# Altium PCB BMS_PCB.PcbDoc
Units mm, origin at the board's own origin, x right, y up, seen from the top; angles counter-clockwise.
Board outline 46.36 x 48.89 mm, 2 copper layers (Top Layer, Bottom Layer); 61 components, 46 nets, 183 pads, 107 vias.
Unrouted connection lines stored in the file: 2.
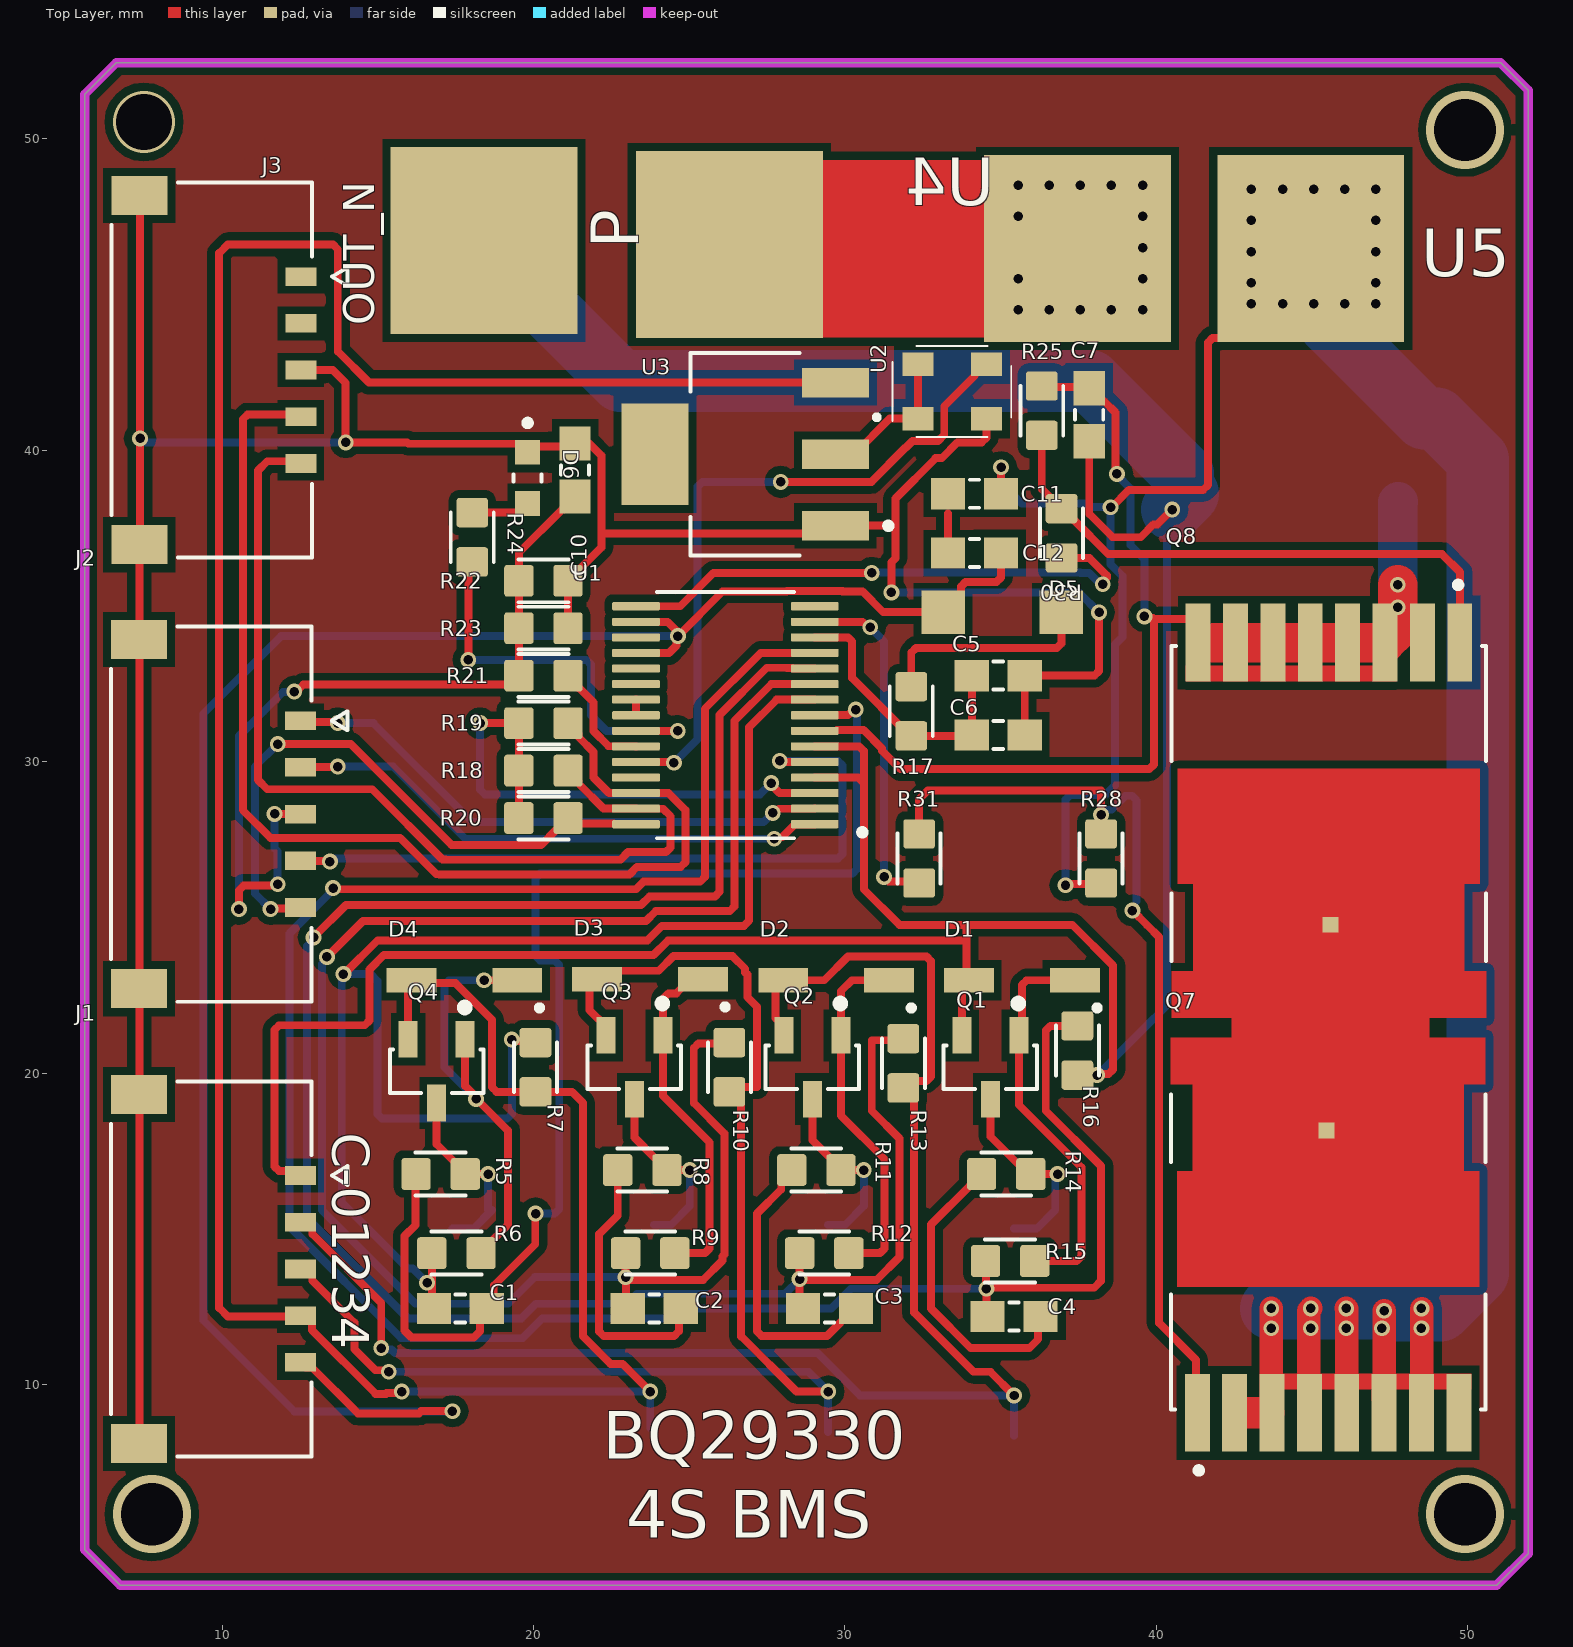
[diagram p0: Top Layer view]
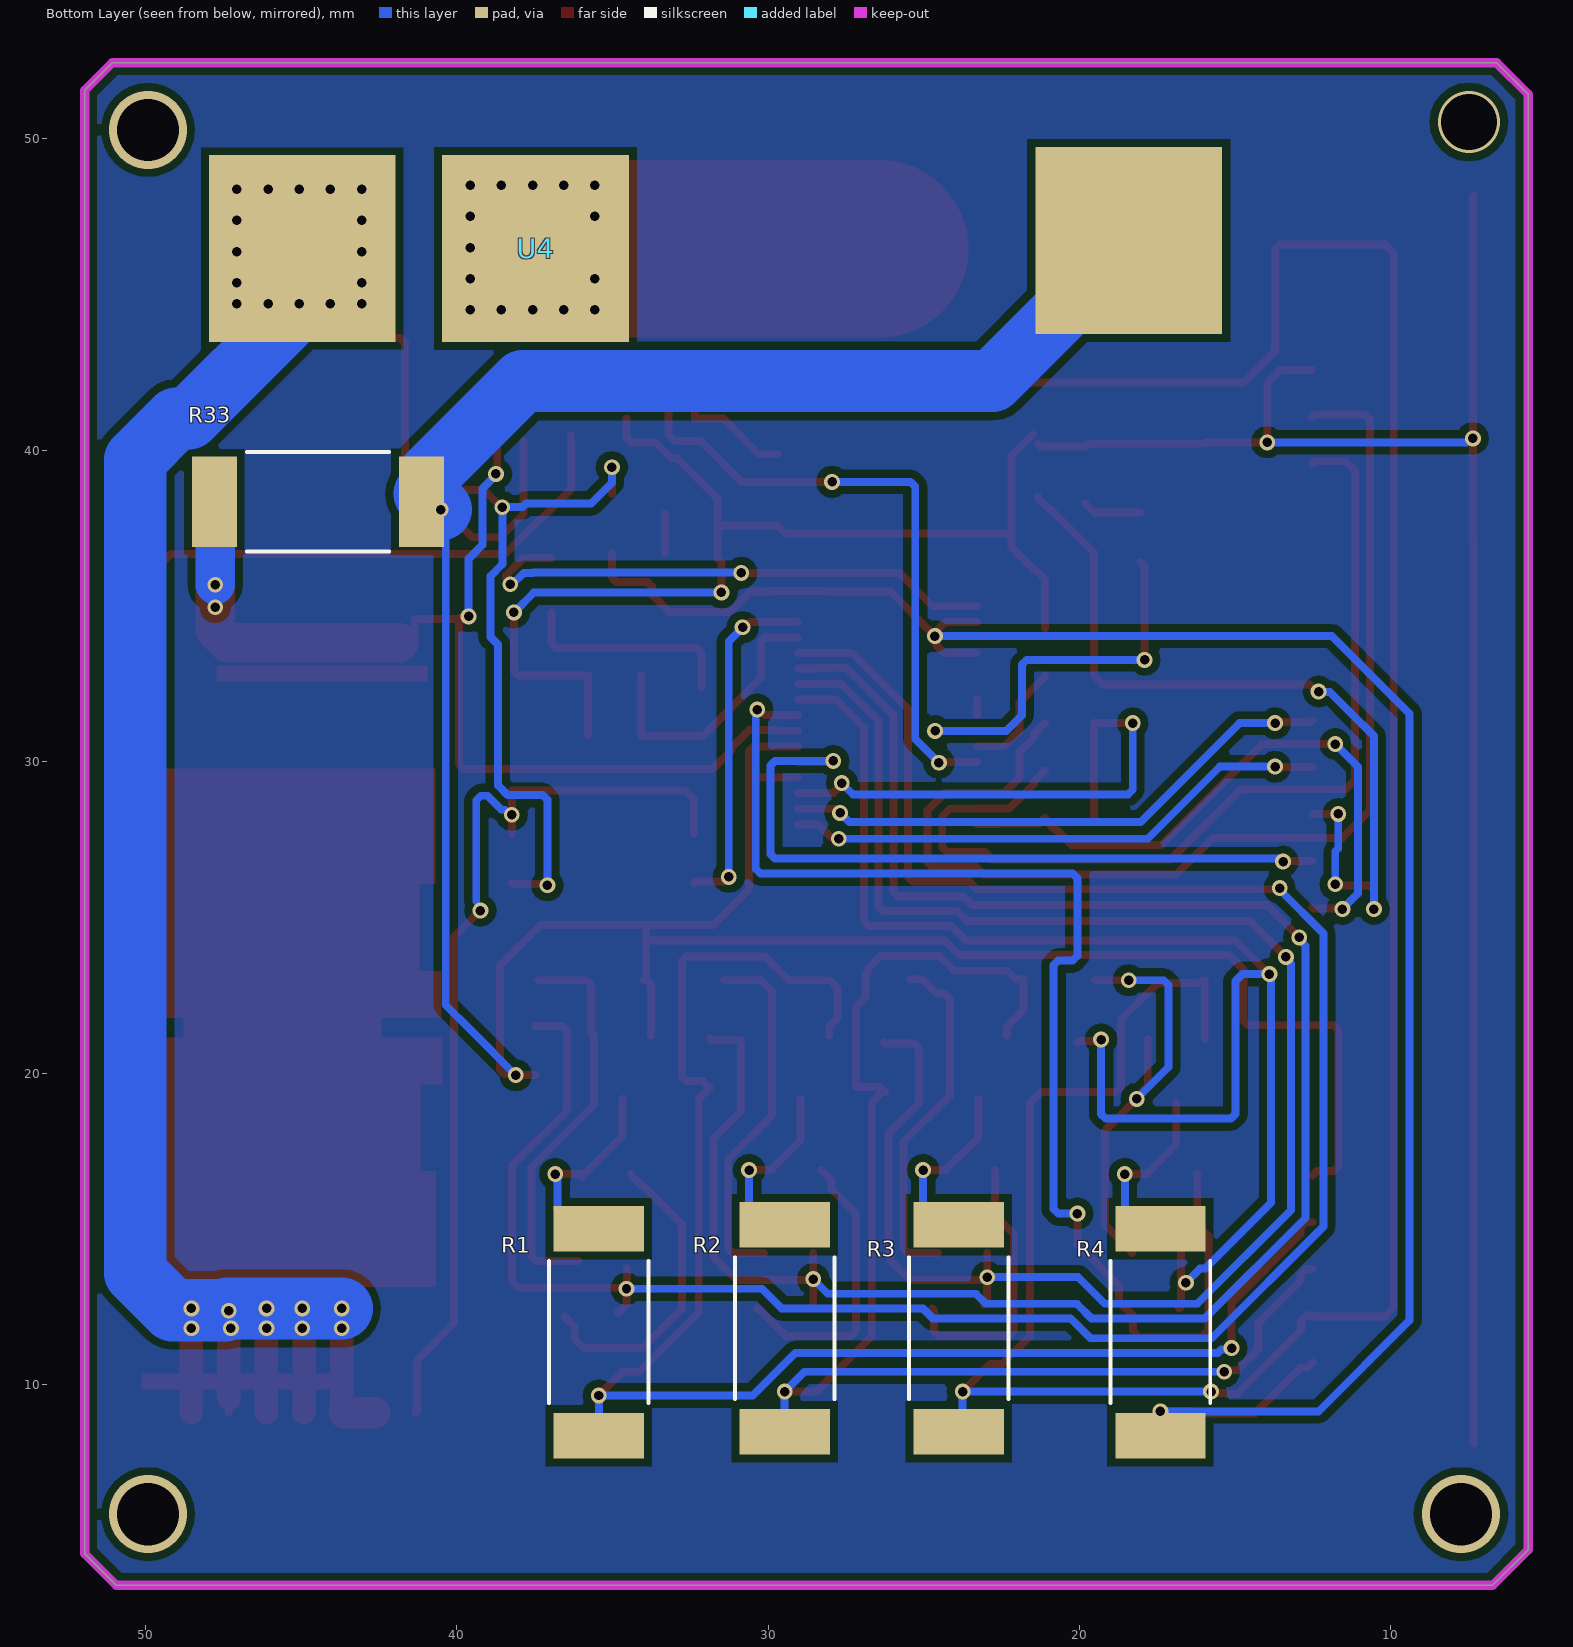
[diagram p1: Bottom Layer view, seen from below]
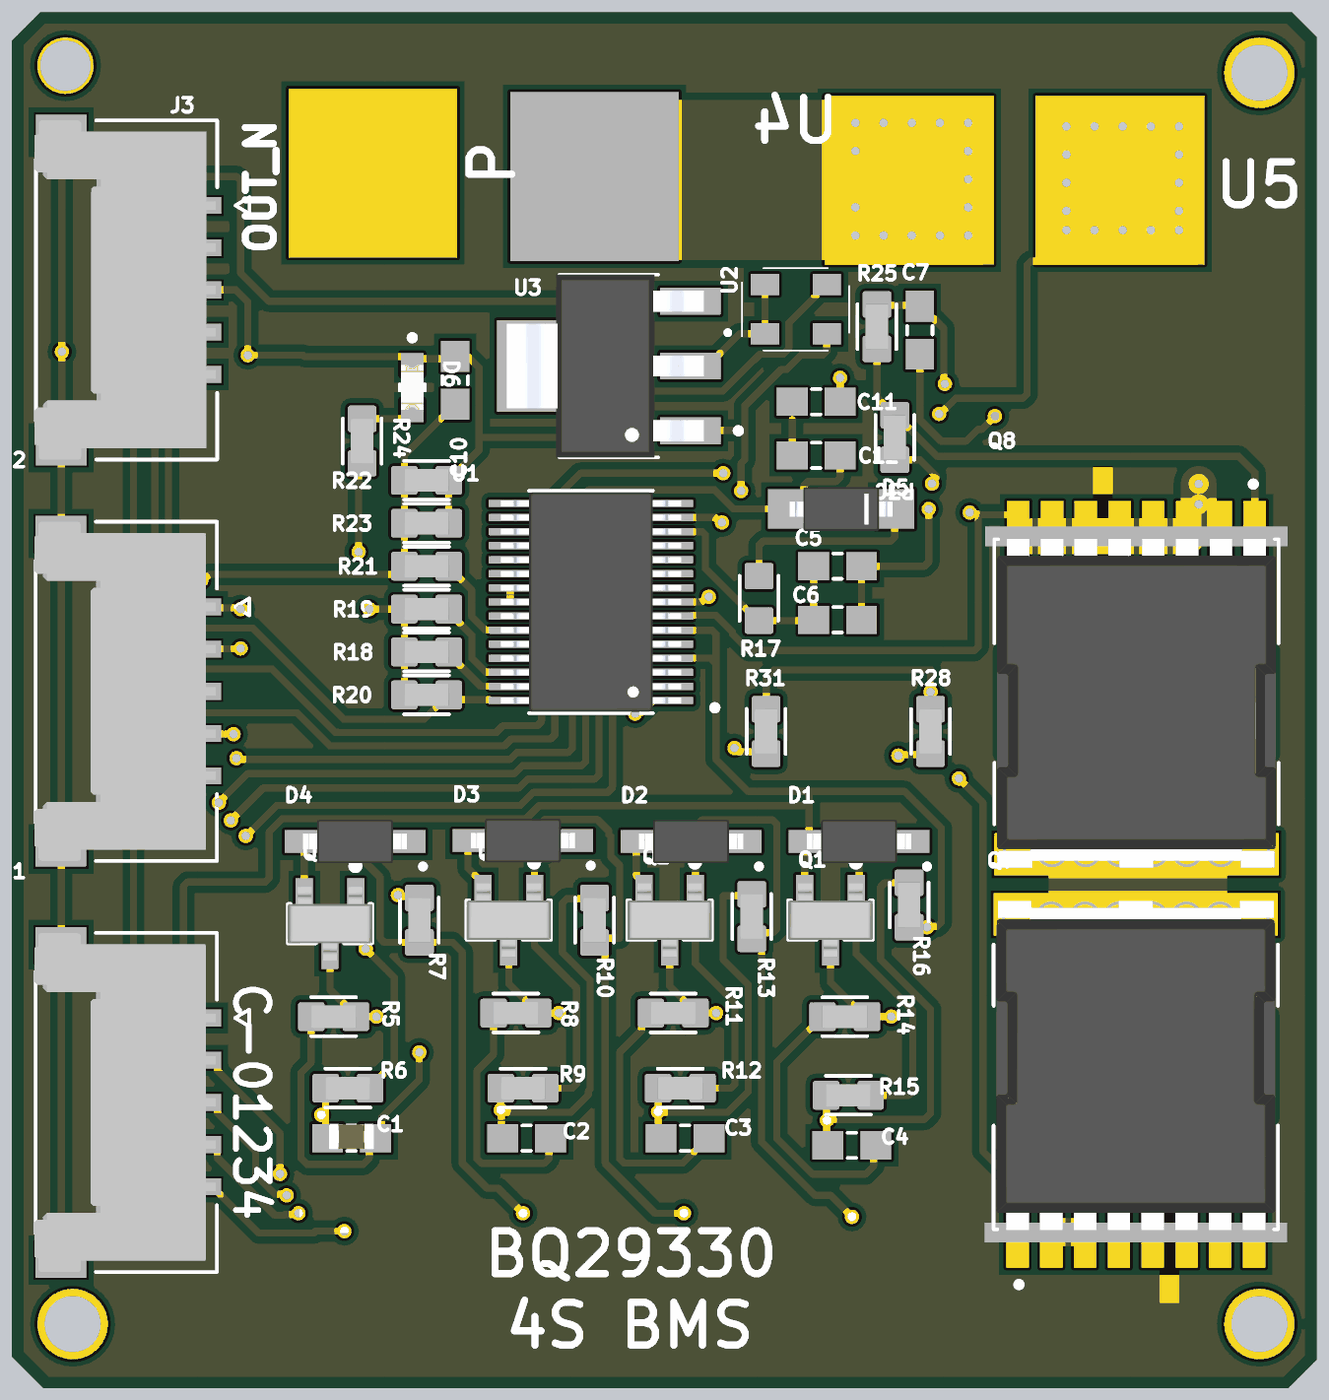
[diagram p2: 3D render of the assembled board from above, using the file's embedded part models]
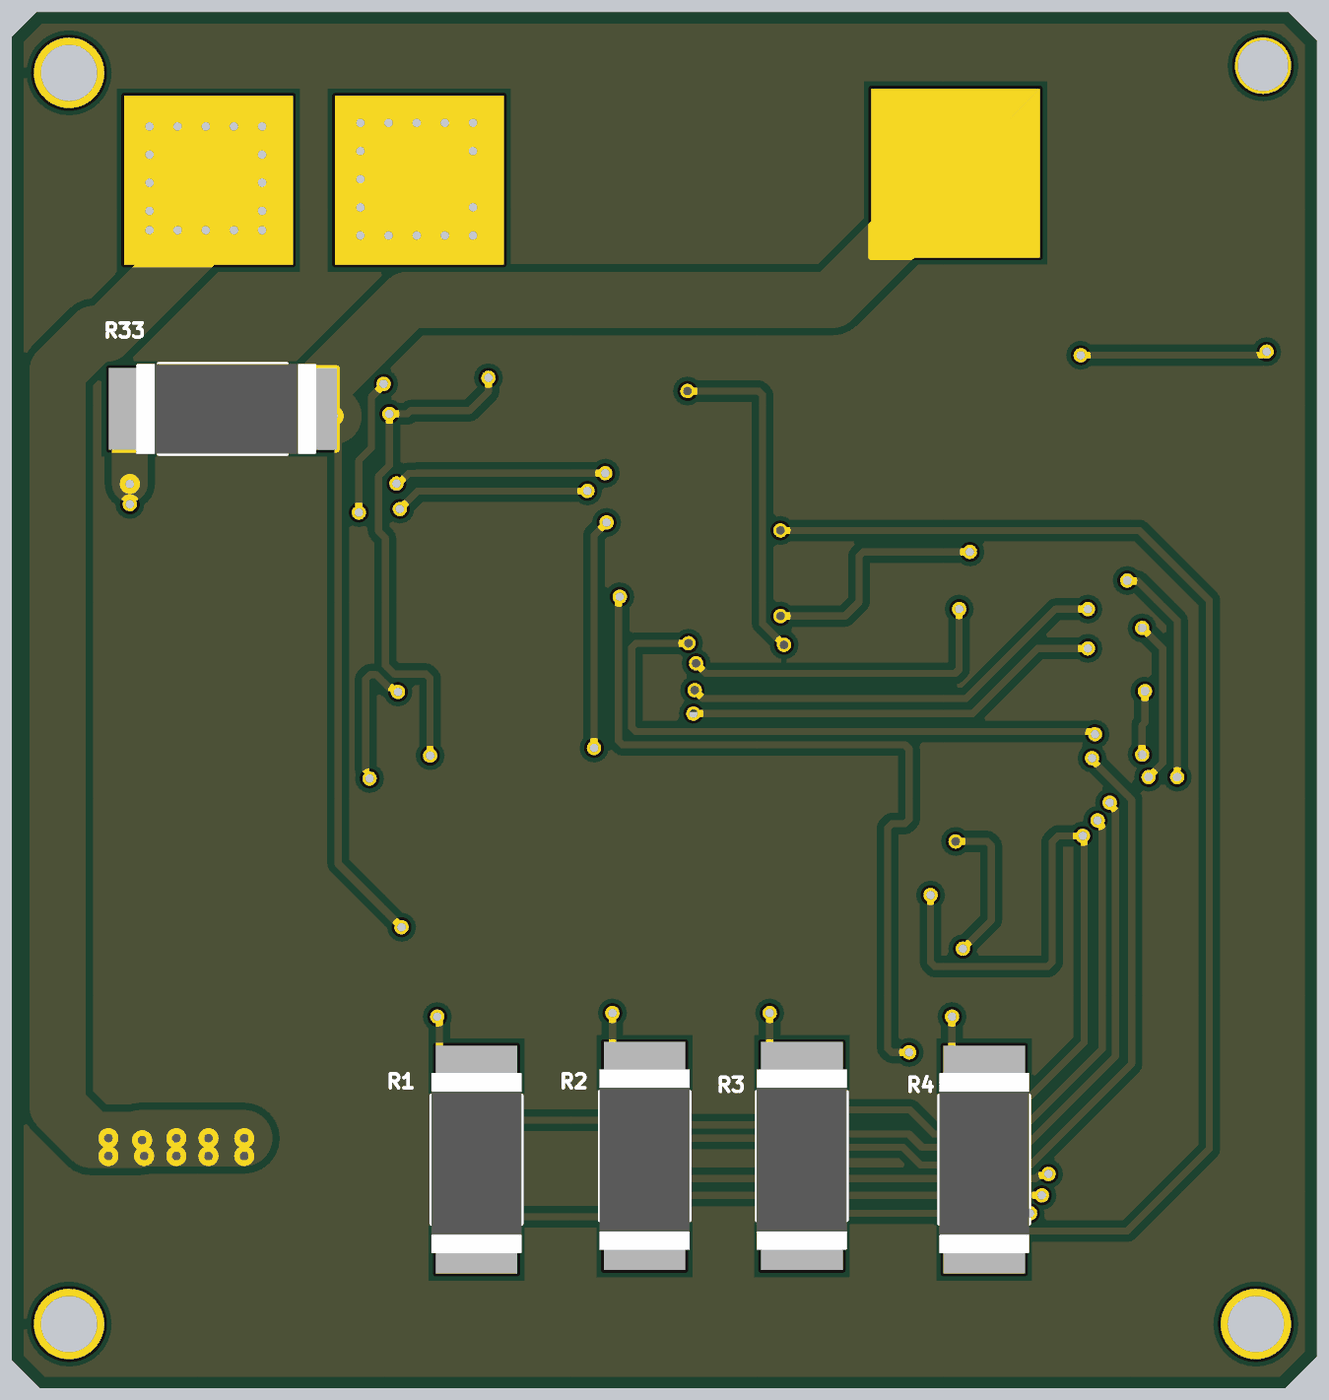
[diagram p3: 3D render of the assembled board from below, using the file's embedded part models]

## Layer stack, top to bottom
Top Solder: solder mask 0.0102, Solder Resist, Dk 3.5
Top Layer: signal copper 0.0356
Dielectric 1: dielectric 0.32, FR-4, Dk 4.8
Bottom Layer: signal copper 0.0356
Bottom Solder: solder mask 0.0102, Solder Resist, Dk 3.5

## Board outline
5.588,4.699 5.588,51.435 6.604,52.451 51.054,52.451 51.943,51.562 51.943,4.572 50.927,3.556 6.731,3.556

## Design rules (kind name [scope] priority, off if disabled: settings)
Clearance [All] p1: gap=0.254 ignorepadtopadclearanceinfootprint=FALSE except(0: Arc-Hole Track-Hole SMDPad-Hole THPad-Hole Via-Hole Fill-Hole Poly-Hole Region-Hole Text-Hole; 0.22: Arc-Arc Arc-Track Arc-SMDPad Track-Track Track-SMDPad SMDPad-SMDPad)
DiffPairsRouting [All] p1: maxlimit=0.254 minlimit=0.24 mostfreqgap=0.24 toplayer_minwidth=0.381 toplayer_maxwidth=0.381 toplayer_prefwidth=0.381 bottomlayer_minwidth=0.381 bottomlayer_maxwidth=0.381 bottomlayer_prefwidth=0.381 maxuncoupledlength=12.7
PolygonConnect [All] p1: connectstyle=Relief reliefconductorwidth=0.254 reliefentries=4 polygonreliefangle="90 Angle" airgapwidth=0.254
RoutingVias [All] p1: holewidth=0.711 width=1.27 viastyle="Through Hole" minholewidth=0.711 minwidth=1.27 maxholewidth=0.711 maxwidth=1.27
SolderMaskExpansion [All] p1: expansion=0.102 istentingtop=FALSE
Width [All] p1: maxlimit=10 minlimit=0.254 preferedwidth=0.254 minimp=50.000000 maximp=50.000000 favimp=50.000000
29 further rules are at their usual default settings.

## Components (designator, comment, footprint, x,y, rotation, side; value= is the part's Value field where it differs from the comment)
C1 "0.1uF" CAPC1608X90 17.653,12.446 r180 top
C2 "0.1uF" CAPC1608X90 23.876,12.446 r180 top
C3 "0.1uF" CAPC1608X90 29.503,12.446 r180 top
C4 "0.1uF" CAPC1608X90 35.433,12.192 r180 top
C5 "2.2uF" CAPC1608X90 34.925,32.766 r0 top
C6 "2.2uF" CAPC1608X90 34.925,30.861 r0 top
C7 "0.1uF" CAPC1608X90 37.846,41.148 r90 top
C10 "0.1uF" CAPC1608X90 21.336,39.37 r90 top
C11 "50V 0.1uF" CAPC1608X90 34.163,38.608 r180 top
C12 "50V 0.1uF" CAPC1608X90 34.163,36.703 r0 top
D1 "MMSZ5232B+" SOD123#1 35.687,22.987 r180 top
D2 "MMSZ5232B+" SOD123#1 29.718,22.987 r180 top
D3 "MMSZ5232B+" SOD123#1 23.741,23.019 r180 top
D4 "MMSZ5232B+" SOD123#1 17.78,22.987 r180 top
D5 "MMSD4148T1G" SOD123#2 35.052,34.798 r180 top
D6 "SML-D12U1WT86" LED_SML-D12Y1WT86 19.812,39.116 r270 top
J1 "5040500591" MOLEX_5040500591 9.652,13.716 r90 top
J2 "5040500591" MOLEX_5040500591 9.652,28.321 r90 top
J3 "5040500591" MOLEX_5040500591 9.663,42.579 r90 top
OUT_N "N_IN" PCBComponent_1#1 15.367,43.688 r0 top (schematic designator U6)
P "P_IN" PCBComponent_1#2 23.241,43.561 r0 top (schematic designator U7)
Q1 "DMG2302UK-7" SOT91P240X105-3N 34.671,20.193 r180 top
Q2 "DMG2302UK-7" SOT91P240X105-3N 28.956,20.193 r180 top
Q3 "DMG2302UK-7" SOT91P240X105-3N 23.241,20.193 r180 top
Q4 "DMG2302UK-7" SOT91P240X105-3N 16.891,20.066 r180 top
Q7 "IPT60R028G7XTMA1" TRANS_IPT60R028G7XTMA1 45.516,14.496 r90 top
Q8 "IPT60R028G7XTMA1" TRANS_IPT60R028G7XTMA1 45.543,28.43 r270 top
R1 "ERJS1TJ561U" RES_ERJS1TJ561U 35.433,11.684 r90 bottom
R2 "ERJS1TJ561U" RES_ERJS1TJ561U 29.464,11.811 r90 bottom
R3 "ERJS1TJ561U" RES_ERJS1TJ561U 23.876,11.811 r90 bottom
R4 "ERJS1TJ561U" RES_ERJS1TJ561U 17.399,11.684 r90 bottom
R5 "100R-1%" RESC1608X50N 17.018,16.764 r180 top
R6 "8-1676481-6" RESC1608X50N 17.526,14.224 r180 top
R7 "100R-1%" RESC1608X50N 20.066,20.193 r90 top
R8 "100R-1%" RESC1608X50N 23.495,16.891 r180 top
R9 "8-1676481-6" RESC1608X50N 23.749,14.224 r180 top
R10 "100R-1%" RESC1608X50N 26.289,20.193 r90 top
R11 "100R-1%" RESC1608X50N 29.083,16.891 r180 top
R12 "8-1676481-6" RESC1608X50N 29.337,14.224 r180 top
R13 "100R-1%" RESC1608X50N 31.877,20.32 r90 top
R14 "100R-1%" RESC1608X50N 35.179,16.764 r180 top
R15 "8-1676481-6" RESC1608X50N 35.306,13.97 r180 top
R16 "100R-1%" RESC1608X50N 37.465,20.729 r90 top
R17 "1k" RESC1608X50N 32.131,31.623 r270 top
R18 "10K" RESC1608X50N 20.32,29.718 r180 top
R19 "10K" RESC1608X50N 20.32,31.242 r180 top
R20 "10K" RESC1608X50N 20.32,28.194 r180 top
R21 "3k7" RESC1608X50N 20.32,32.766 r180 top
R22 "4k7" RESC1608X50N 20.32,35.814 r180 top
R23 "Thermometer" RESC1608X50N 20.32,34.29 r180 top
R24 "4k7" RESC1608X50N 18.034,37.211 r90 top
R25 "100k" RESC1608X50N 36.322,41.275 r270 top
R28 "100k" RESC1608X50N 38.227,26.896 r90 top
R30 "10K" RESC1608X50N 36.957,37.338 r270 top
R31 "10K" RESC1608X50N 32.385,26.896 r90 top
R33 "0.047R 1%" RES_ERJS1TJ561U 44.45,38.354 r0 bottom
U1 "BQ29330" SOP50P640X120-30N 26.162,31.496 r180 top
U2 "7XZ-32.768KBA-T" OSCCILATOR 31.403,40.808 r0 top
U3 "LM1117IMP-5.0-NOPB" SOT230P700X180-4N 26.797,39.878 r180 top
U4 "P_OUT" PCBComponent_1#1 40.513,43.434 r180 bottom
U5 "N_OUT" PCBComponent_1#1 41.91,43.434 r0 top

## Footprints (in the part's own frame and the unit in brackets; to place one, negate y for a bottom-side part, rotate by r counter-clockwise, add the part's x,y. Pads: shape width x height; smd on the part's side, far side on the other; paste and mask are expansions set on the pad)
CAPC1608X90 [mm]
  rect 1.1x1 smd: 1(-0.85,0) 2(0.85,0)
  silkscreen extent -0.15,-0.45 0.15,0.45, body extent -0.8,-0.51 0.8,0.39, height 0.81
LED_SML-D12Y1WT86 [mm]
  rect 0.8x0.8 smd: A(0.825,0) C(-0.825,0)
  silkscreen extent -1.86,-0.45 0.11,0.45, body extent -0.8,-0.4 0.8,0.4, height 0.55
MOLEX_5040500591 [mm]
  rect 0.6x1 smd mask+0: 1(3,-2.87) 2(1.5,-2.87) 3(0,-2.87) 4(-1.5,-2.87) 5(-3,-2.87)
  rect 1.25x1.8 smd mask+0: S1(5.605,2.32) S2(-5.605,2.32)
  silkscreen extent -6.02,-4.37 6.02,3.22, body extent -6.03,-3.18 6.02,3.26, height 1.97
OSCCILATOR [mm]
  rect 1x0.75 smd: 1(0.941,0.213) 2(3.141,0.213) 3(3.141,1.963) 4(0.941,1.963)
  silkscreen extent -0.41,-0.38 3.94,2.54, body extent 0.64,0 3.43,2.16, height 0.98
PCBComponent_1#1 [mm]
  rect 6x6 all layers, no hole: 1(3.048,3.048)
PCBComponent_1#2 [mm]
  rect 6x6 smd: 1(3.048,3.048)
RES_ERJS1TJ561U [mm]
  rect 1.45x2.9 smd: 1(-3.325,0) 2(3.325,0)
  silkscreen extent -2.28,-1.6 2.28,1.6, body extent -3.33,-1.6 3.07,1.6, height 0.6
RESC1608X50N [mm]
  rrect20% 0.94x1.02 smd: 1(-0.79,0) 2(0.79,0)
  silkscreen extent -0.8,-0.69 0.8,0.69, body extent -0.8,-0.4 0.8,0.4, height 0.43
SOD123#1 [mm]
  rect 1.6x0.8 smd: 1(-1.7,0) 2(1.7,0)
  silkscreen extent -2.46,0.84 -2.36,0.94, body extent -1.85,-0.77 1.85,0.78, height 1.43
SOD123#2 [mm]
  rect 1.4x1.4 smd: A(1.9,0) C(-1.9,0)
  body extent -1.82,-0.77 1.83,0.78, height 1.43
SOP50P640X120-30N [mm]
  rrect25% 1.53x0.26 smd paste+0 mask+0.102: 1(-2.87,3.5)
  rrect25% 1.53x0.26 smd: 2(-2.87,3) 3(-2.87,2.5) 4(-2.87,2) 5(-2.87,1.5) 6(-2.87,1) 7(-2.87,0.5) 8(-2.87,0) 9(-2.87,-0.5) 10(-2.87,-1) 11(-2.87,-1.5) 12(-2.87,-2) 13(-2.87,-2.5) 14(-2.87,-3) 15(-2.87,-3.5) 16(2.87,-3.5) 17(2.87,-3) 18(2.87,-2.5) 19(2.87,-2) 20(2.87,-1.5) 21(2.87,-1) 22(2.87,-0.5) 23(2.87,0) 24(2.87,0.5) 25(2.87,1) 26(2.87,1.5) 27(2.87,2) 28(2.87,2.5) 29(2.87,3) 30(2.87,3.5)
  silkscreen extent -4.5,-3.95 2.2,3.95, body extent -3.2,-3.9 3.2,3.9, height 1.2
SOT91P240X105-3N [mm]
  rect 0.61x1.18 smd: 1(-0.915,-1.025) 2(0.915,-1.025) 3(0,1.025)
  silkscreen extent -1.5,-2.1 1.5,0.7, body extent -1.5,-1.31 1.5,1.31, height 1.08
SOT230P700X180-4N [mm]
  rect 2.15x0.95 smd: 1(-2.9,2.3) 2(-2.9,0) 3(-2.9,-2.3)
  rect 2.15x3.25 smd: 4(2.9,0)
  silkscreen extent -4.7,-3.25 1.75,3.25, body extent -3.37,-3.25 3.63,3.25, height 1.8
TRANS_IPT60R028G7XTMA1 [mm]
  rect 2.5x0.8 smd paste-2: 1(-5.4,4.2) 2(-5.4,3) 3(-5.4,1.8) 4(-5.4,0.6) 5(-5.4,-0.6) 6(-5.4,-1.8) 7(-5.4,-3) 8(-5.4,-4.2)
  rect 0.5x0.5 smd paste-1 mask+0: 9(3.665,0.05)
  Top Layer region: 6.65,-5.05 5.15,-5.05 5.15,-4.35 2.35,-4.35 2.35,-4.85 -1.35,-4.85 -1.35,4.85 2.35,4.85 2.35,4.35 5.15,4.35 5.15,5.05 6.65,5.05
  Top Layer region: -4.15,-4.6 -4.65,-4.6 -4.65,2.159 -4.15,2.159
  silkscreen extent -7.35,-5.05 4.83,5.05, body extent -5.31,-4.95 6.37,4.95, height 2.38

## Part data
C1 C2 C3 C4 C5 C6 C7 C10 C11 C12: library part LD035C181JAB2A, "CAP CER SMD", Package="0603 AVX", Availability=Unavailable, MF=AVX, MP=LD035C181JAB2A, Price=None, SnapEDA_Link=https://www.snapeda.com/parts/LD035C181JAB2A/AVX/view-part/2034489/?ref=snap
D1 D2 D3 D4: "Zener Diode 5.6V 500mW Â±5% Surface Mount SOD-123", Package="SOD-123 Fairchild Semiconductor", Availability=Bad, Check_prices=https://www.snapeda.com/parts/MMSZ5232B/ON%20Semiconductor/view-part/345101/?ref=eda, MF="ON Semiconductor", MP=MMSZ5232B, Price=None, SnapEDA_Link=https://www.snapeda.com/parts/MMSZ5232B/ON%20Semiconductor/view-part/345101/?ref=snap
D5: "DIODE GEN PURP 100V 200MA SOD123", Package="SOD-123 ON Semiconductor", Availability=Unavailable, MF="ON Semiconductor", MP=MBR0520L, Price=None, SnapEDA_Link=https://www.snapeda.com/parts/MBR0520L/ON%20Semiconductor/view-part/1413138/?ref=snap
D6: "Red 620nm LED Indication - Discrete 2.2V 0603 _1608 Metric_", Package="0603 Rohm", Availability=Unavailable, MF=Rohm, MP=SML-D12U1WT86, Price=None, SnapEDA_Link=https://www.snapeda.com/parts/SML-D12U1WT86/Rohm/view-part/481503/?ref=snap
J1 J2 J3: "Connector Header Surface Mount, Right Angle 5 position 0.059 (1.50mm)", Package=None, Availability="In Stock", Check_prices=https://www.snapeda.com/parts/5040500591/Molex/view-part/3596761/?ref=eda, MF=Molex, MP=5040500591, Price=None, Purchase-URL=https://pricing.snapeda.com/search/part/5040500591/?ref=eda, SnapEDA_Link=https://www.snapeda.com/parts/5040500591/Molex/view-part/3596761/?ref=snap
OUT_N P U4 U5: library part battery_socket, "Soldering part"
Q1 Q2 Q3 Q4: "N-Channel 20 V 2.8A (Ta) 660mW (Ta) Surface Mount SOT-23-3", Package="SOT-23 Diodes Inc.", Availability="In Stock", Check_prices=https://www.snapeda.com/parts/DMG2302UK-7/Diodes+Inc./view-part/?ref=eda, MF="Diodes Inc.", MP=DMG2302UK-7, Price=None, Purchase-URL=https://pricing.snapeda.com/search/part/DMG2302UK-7/?ref=eda, SnapEDA_Link=https://www.snapeda.com/parts/DMG2302UK-7/Diodes+Inc./view-part/?ref=snap
Q7 Q8: "Gives best-in-class FOM R DS_on_xE oss and R DS_on_xQ G", Package="PowerSFN-8 Infineon Technologies", Digi-Key_Part_Number=IPT60R028G7XTMA1CT-ND, Digi-Key_Purchase_URL=https://www.digikey.com/product-detail/en/infineon-technologies/IPT60R028G7XTMA1/IPT60R028G7XTMA1CT-ND/8655821?utm_source=snapeda&utm_medium=aggregator&utm_campaign=symbol, MF="Infineon Technologies", MP=IPT60R028G7XTMA1, SnapEDA_Link=https://www.snapeda.com/parts/IPT60R028G7XTMA1/Infineon%20Technologies/view-part/748997/?ref=snap
R1 R2 R3 R4: Package=None, Availability=Unavailable, MP=ERJS1TJ561U, Price=None
R5 R7 R8 R10 R11 R13 R14 R16 R18 R19 R20 R21 R22 R23 R24 R25 R28 R30 R31: library part 8-1676481-6, "CPF 0603 10K 0.1% 25PPM 1K RL", Package=None, Availability=Unavailable, MP=8-1676481-6, Price=None
R6 R9 R12 R15: "CPF 0603 10K 0.1% 25PPM 1K RL", Package=None, Availability=Unavailable, MP=8-1676481-6, Price=None
R17: library part 8-1676481-6, "CPF 0603 30K 0.1% 25PPM 1K RL", Package=None, Availability=Unavailable, MP=8-1676481-6, Price=None
R33: library part ERJS1TJ561U, Package=None, Availability=Unavailable, MP=ERJS1TJ561U, Price=None
U2: "Oscillator 32.768 Khz"
U3: Package="SOT-223 Texas Instruments", Availability=Unavailable, MF="Texas Instruments", MP=LM1117IMP50, Price=None, SnapEDA_Link=https://www.snapeda.com/parts/LM1117IMP50/Texas%20Instruments/view-part/77914/?ref=snap

## Via types
v1: diameter 0.508, hole 0.305, Top Layer to Bottom Layer, 103 vias
v2: diameter 2.5, hole 2, Top Layer to Bottom Layer, 3 vias
v3: diameter 2, hole 1.8, Top Layer to Bottom Layer, 1 vias

## Nets (pads, with @x,y where several pads share a name; then routed paths per layer and width w, separated by ;. In a path a pad name is that pad's centre, name@x,y a point inside that pad or via, vN(x,y) a via of type N, cw(c..) or ccw(c..) an arc to the next point about the centre after c; other vN are vias at no path point)
3V3: U2.1 U2.4 U3.2 | length 4.9
  Top Layer w0.254: U3.2 30.297,39.878 31.44,41.021 U2.1 U2.4
cell_0: C7.1 D1.2 J1.1 OUT_N.1 Q1.2 R16.1 R33.1 U1.4 U1.6 | length 106.6
  Top Layer w0.254: J1.1 12.38,16.858 11.833,16.858 11.684,17.006 11.684,21.393 11.833,21.542 14.583,21.542 14.732,21.691 14.732,23.33 15.196,23.793 23.855,23.793 24.319,24.257 33.909,24.257 ; U1.4 30.426,29.496 30.607,29.315 ; U1.6 29.035,30.493 30.458,30.493 30.607,30.344 30.607,29.315 ; Q1.2 33.756,22.854 D1.2@33.938,23.036 ; D1.2 D1.2@33.938,23.036 ; R16.1 v1(38.1,19.939) 38.131,19.97 38.459,19.97 38.608,20.119 38.608,23.457 37.3,24.765 33.909,24.765 ; C7.1 37.846,37.964 38.599,37.211 39.497,37.211 39.911,37.625 40.038,37.625 v1(40.513,38.1) ; 30.607,29.315 30.607,25.908 31.75,24.765 33.909,24.765 ; 33.909,24.257 33.909,23.065 D1.2@33.938,23.036 ; 33.909,24.257 33.909,24.765
  Bottom Layer w0.254: v1(38.1,19.939) 39.556,21.395 40.348,22.187 40.348,37.866 40.513,38.031 v1(40.513,38.1)
  Bottom Layer w2: OUT_N.1 20.415,44.736 20.415,44.607 22.794,42.228 37.883,42.228 40.85,39.261 40.85,38.775 41.019,38.606 v1(40.513,38.1)
cell_1: D2.2 J1.2 Q2.2 R1.1 R13.1 | length 51
  Top Layer w0.254: J1.2 12.722,15.216 12.895,15.043 12.895,14.843 15.113,12.625 v1(15.113,11.176) ; Q2.2 28.041,21.503 27.771,21.773 27.771,22.74 D2.2 29.337,22.987 30.099,23.749 32.617,23.749 32.766,23.6 32.766,19.894 32.617,19.746 32.093,19.746 R13.1 31.881,19.53 32.224,19.187 32.224,12.318 34.127,10.415 34.67,10.415 v1(35.433,9.652)
  Bottom Layer w0.254: v1(15.113,11.176) 15.162,11.127 15.443,11.127 15.556,11.015 29.126,11.015 30.489,9.652 v1(35.433,9.652) R1.1
cell_2: D3.2 J1.3 Q3.2 R2.1 R10.1 | length 44.5
  Top Layer w0.254: J1.3 12.722,13.716 12.895,13.543 12.895,13.343 14.248,11.99 14.248,11.143 14.928,10.463 15.302,10.463 v1(15.35,10.414) ; Q3.2 22.326,21.503 21.795,22.034 21.795,23.019 D3.2 22.314,23.292 24.023,23.292 24.497,23.766 26.385,23.766 26.797,23.353 26.797,23.241 26.871,23.167 26.871,22.443 27.178,22.136 27.178,19.552 26.398,19.552 26.249,19.403 R10.1 26.327,19.403 26.67,19.06 26.67,11.551 28.442,9.779 v1(29.464,9.779)
  Bottom Layer w0.254: v1(15.35,10.414) 28.829,10.414 v1(29.464,9.779) R2.1
cell_3: D4.2 J1.4 Q4.2 R3.1 R7.1 U3.3 | length 94.8
  Top Layer w0.254: v1(15.771,9.779) 15.722,9.73 15.287,9.73 15.263,9.706 14.932,9.706 12.887,11.751 12.887,12.043 12.714,12.216 J1.4 12.498,12.192 10.182,12.192 9.906,12.468 9.906,46.333 10.182,46.609 13.567,46.609 13.716,46.46 13.716,43.18 14.718,42.178 U3.3 ; Q4.2 D4.2@15.976,22.987 ; D4.2 16.174,22.893 17.493,22.893 18.669,21.717 18.669,19.552 18.818,19.403 R7.1 21.237,19.403 21.59,19.05 21.59,11.553 22.475,10.669 22.859,10.669 v1(23.749,9.779)
  Bottom Layer w0.254: v1(15.771,9.779) v1(23.749,9.779) 23.749,8.613 R3.1
cell_4: C12.2 D5.A J1.5 P.1 R4.1 U1.17 U1.19 U4.1 | length 77.8
  Top Layer w0.254: J1.5 12.695,10.543 12.9,10.543 14.364,9.079 16.32,9.079 16.393,9.151 17.392,9.151 v1(17.399,9.144) ; U1.19 24.352,33.496 24.589,33.733 24.589,33.987 v1(24.638,34.036) ; U1.17 23.295,34.493 24.308,34.493 24.589,34.212 24.589,34.085 v1(24.638,34.036) ; P.1 P.1@26.416,46.482 ; C12.2 35.011,36.701 35.011,35.922 34.862,35.773 33.874,35.773 33.725,35.625 33.725,35.371 D5.A 33.145,34.805 31.231,34.805 30.562,35.474 29.925,35.474 29.919,35.48 28.14,35.48 28.134,35.474 26.076,35.474 v1(24.638,34.036)
  Top Layer w5.7: P.1@26.416,46.482 U4.1
  Bottom Layer w0.254: v1(17.399,9.144) 12.319,9.144 9.398,12.065 9.398,31.544 11.89,34.036 v1(24.638,34.036)
  other v1: 35.56,44.514 36.56,44.514 37.56,44.514 38.56,44.514 39.56,44.514 35.56,45.514 39.56,45.514 39.56,46.514 35.56,47.514 39.56,47.514 35.56,48.514 36.56,48.514 37.56,48.514 38.56,48.514 39.56,48.514
CELL_N: J2.2 U1.1 | length 17.7
  Top Layer w0.254: J2.2 12.534,29.833 13.704,29.833 v1(13.716,29.845) ; v1(27.73,27.529) 27.778,27.578 27.979,27.578 28.394,27.993 29.029,27.993 U1.1
  Bottom Layer w0.254: v1(13.716,29.845) 15.494,29.845 17.81,27.529 v1(27.73,27.529)
CELL_P: J2.1 U1.2 | length 18
  Top Layer w0.254: J2.1 12.561,31.281 13.677,31.281 v1(13.716,31.242) ; v1(27.686,28.361) 27.755,28.361 27.887,28.493 29.029,28.493 U1.2
  Bottom Layer w0.254: v1(13.716,31.242) 14.859,31.242 18.034,28.067 27.392,28.067 v1(27.686,28.361)
CHG_EN: R31.1 U1.14 | length 11.3
  Top Layer w0.254: U1.14 30.57,34.496 30.746,34.32 v1(30.815,34.32) ; v1(31.26,26.307) 31.404,26.162 32.329,26.162 R31.1
  Bottom Layer w0.254: v1(30.815,34.32) 30.815,34.311 31.26,33.867 v1(31.26,26.307)
DSG_EN: R30.2 U1.16 | length 17.6
  Top Layer w0.254: U1.16 24.709,34.996 25.781,36.068 v1(30.861,36.068) ; R30.2 37.848,36.548 38.419,35.977 38.419,35.911 38.278,35.769 v1(38.278,35.7)
  Bottom Layer w0.254: v1(30.861,36.068) 30.868,36.075 37.553,36.075 37.564,36.064 37.845,36.064 38.209,35.7 v1(38.278,35.7)
GND: C5.2 C6.2 C10.2 D6.C J1.S1 J1.S2 J2.S1 J2.S2 J3.3 J3.S1 J3.S2 R22.1 R23.1 U2.2 U3.1 | length 94.9
  Top Layer w0.254: J1.S2 7.343,8.122 7.343,19.321 7.343,22.716 7.343,33.926 J3.S2 7.366,36.998 7.366,48.161 J3.S1 ; J3.3 13.555,42.579 13.97,42.164 v1(13.97,40.259) 15.944,40.259 15.989,40.214 19.73,40.214 19.812,40.132 21.248,40.132 C10.2 ; R23.1 R22.1 21.11,35.854 21.453,36.197 21.493,36.197 22.183,36.887 22.183,37.338 ; C10.2@21.501,40.513 22.183,39.831 22.183,37.338 ; v1(31.496,35.44) 31.496,36.409 31.623,36.536 31.623,37.443 ; U2.2 34.544,40.408 34.395,40.259 33.618,40.259 33.11,39.751 32.915,39.751 31.623,38.459 31.623,37.443 ; C6.2 C5.2 38.011,32.766 38.16,32.915 v1(38.16,34.798) ; 22.183,37.338 29.457,37.338 U3.1 29.711,37.592 31.474,37.592 31.623,37.443
  Bottom Layer w0.254: v1(7.366,40.386) 7.435,40.386 7.562,40.259 v1(13.97,40.259) ; v1(31.496,35.44) 31.503,35.433 37.525,35.433 v1(38.16,34.798)
MCU_SCLK: J3.4 R19.1 U1.28 | length 36.9
  Top Layer w0.254: J3.4 12.464,41.148 10.817,41.148 10.668,40.999 10.668,28.448 11.557,27.559 15.713,27.559 16.883,26.389 16.974,26.389 16.981,26.382 23.08,26.382 23.325,26.627 24.729,26.627 24.878,26.776 24.878,28.447 24.332,28.993 23.295,28.993 U1.28 23.289,28.999 22.422,28.999 21.928,29.494 21.928,30.316 21.453,30.791 21.453,30.899 R19.1
MCU_SDA: J3.5 R18.1 U1.29 | length 30.9
  Top Layer w0.254: J3.5 12.459,39.653 11.452,39.653 11.151,39.352 11.151,29.42 11.452,29.119 14.823,29.119 17.079,26.863 17.171,26.863 17.178,26.856 22.792,26.856 23.037,27.101 24.255,27.101 24.404,27.25 24.404,28.251 24.162,28.493 23.295,28.493 23.289,28.499 22.252,28.499 21.453,29.298 21.453,29.375 R18.1
NetC1_1: C1.1 R5.2 U1.8 | length 41.3
  Top Layer w0.254: R5.2 16.218,16.754 16.218,15.13 15.862,14.774 15.862,11.738 16.085,11.515 18.081,11.515 18.279,11.714 18.279,12.222 18.726,12.669 18.726,13.178 20.056,14.508 20.056,15.484 v1(20.066,15.494) ; U1.8 29.035,31.499 30.097,31.499 30.278,31.68 v1(30.346,31.68)
  Bottom Layer w0.254: v1(20.066,15.494) 20.679,15.494 20.828,15.643 20.828,23.473 20.679,23.622 20.215,23.622 20.066,23.771 20.066,26.267 20.215,26.416 30.246,26.416 30.395,26.565 30.395,31.631 v1(30.346,31.68)
NetC1_2: C1.2 R6.2 R7.2 U1.9 | length 48.7
  Top Layer w0.254: v1(13.897,23.185) 13.917,23.185 14.999,24.267 23.659,24.267 24.122,24.731 26.754,24.731 26.924,24.901 26.924,31.112 27.808,31.996 U1.9 ; v1(16.581,13.273) 16.63,13.224 16.712,13.224 v1@16.736,13.2 ; R6.2 v1@16.736,13.2 ; C1.2 16.736,12.513 v1@16.736,13.2 ; v1(19.304,21.082) 19.353,21.033 20.016,21.033 R7.2
  Bottom Layer w0.254: v1(13.897,23.185) 13.849,23.136 13.849,22.957 13.843,22.951 13.843,15.851 15.962,13.732 16.122,13.732 v1(16.581,13.273) ; v1@13.899,23.185 14.766,23.185 14.986,22.965 14.986,18.691 15.135,18.542 19.155,18.542 19.304,18.691 v1(19.304,21.082)
NetC2_1: C2.1 R8.2 | length 8.9
  Top Layer w0.254: R8.2 22.705,15.434 22.108,14.837 22.108,11.706 22.257,11.557 24.511,11.557 24.668,11.714 24.668,12.388 C2.1
NetC2_2: C2.2 R9.2 R10.2 U1.10 | length 55.9
  Top Layer w0.254: v1(13.369,23.734) 14.527,24.892 23.613,24.892 23.926,25.205 26.301,25.205 26.45,25.354 26.45,31.308 27.635,32.493 29.029,32.493 U1.10 ; R9.2 v1(22.959,13.451) ; C2.2@23.065,12.573 22.969,12.669 22.969,13.442 v1(22.959,13.451) ; R10.2 26.261,20.955 25.295,20.955 25.146,20.806 25.146,19.05 26.128,18.068 26.128,14.176 26.071,14.119 26.071,13.987 25.451,13.367 23.112,13.367 23.028,13.451 v1(22.959,13.451)
  Bottom Layer w0.254: v1(13.369,23.734) 13.369,23.665 13.208,23.504 13.208,15.603 16.213,12.598 19.187,12.598 20.041,13.451 v1(22.959,13.451)
NetC3_1: C3.1 R11.2 | length 9.2
  Top Layer w0.254: R11.2 27.956,16.554 27.956,16.272 27.178,15.494 27.178,11.714 27.327,11.565 29.422,11.565 30.303,12.446 C3.1
NetC3_2: C3.2 R12.2 R13.2 U1.11 | length 63.5
  Top Layer w0.254: v1(12.94,24.364) 13.976,25.4 23.451,25.4 23.73,25.679 25.827,25.679 25.976,25.828 25.976,31.504 27.492,33.02 28.141,33.02 28.142,33.019 28.313,33.019 28.333,32.999 29.029,32.999 U1.11 ; R12.2 v1(28.547,13.388) ; C3.2 28.547,12.552 v1(28.547,13.388) ; R13.2 31.827,21.06 30.861,21.06 30.861,18.796 31.75,17.907 31.75,14.097 31.02,13.367 28.568,13.367 v1(28.547,13.388)
  Bottom Layer w0.254: v1(12.94,24.364) 12.94,24.295 12.734,24.089 12.734,15.362 15.972,12.124 19.61,12.124 20.084,12.598 23.003,12.598 23.326,12.92 28.079,12.92 v1(28.547,13.388)
NetC4_1: C4.1 R14.2 | length 10
  Top Layer w0.254: R14.2 34.389,16.724 34.046,16.381 34.006,16.381 32.766,15.141 32.766,12.446 34.04,11.172 35.919,11.172 36.207,11.46 36.207,11.862 C4.1@36.537,12.192
NetC4_2: C4.2 R15.2 R16.2 U1.12 | length 73
  Top Layer w0.254: v1(13.567,25.945) 13.604,25.908 23.288,25.908 23.533,26.153 25.353,26.153 25.502,26.302 25.502,31.701 27.297,33.496 U1.12 ; R15.2@34.544,13.744 34.53,13.73 34.53,13.095 v1(34.544,13.081) ; C4.2@34.837,12.319 34.79,12.319 34.544,12.565 v1(34.544,13.081) ; R16.2 36.598,21.519 36.449,21.37 36.449,18.796 38.227,17.018 38.227,13.335 38.005,13.113 34.576,13.113 v1(34.544,13.081)
  Bottom Layer w0.254: v1(13.567,25.945) 13.567,25.888 12.162,24.484 12.162,15.079 15.752,11.489 19.646,11.489 20.281,12.124 24.701,12.124 25.023,12.446 29.561,12.446 30.196,13.081 v1(34.544,13.081)
NetC5_1: C5.1 C6.1 R17.2 U1.13 | length 9
  Top Layer w0.254: U1.13 29.035,33.993 30.103,33.993 30.226,33.87 30.226,32.698 32.091,30.833 R17.2 34.047,30.833 C6.1 C5.1
NetC11_2: C11.2 C12.1 | length 1.3
  Top Layer w0.254: C12.1 33.313,37.973
NetD1_1: D1.1 Q1.1 R15.1 | length 12.9
  Top Layer w0.254: R15.1 37.443,13.97 37.592,14.119 37.592,16.983 35.586,18.989 Q1.1 35.687,21.319 35.687,22.838 35.836,22.987 D1.1
NetD2_1: D2.1 Q2.1 R12.1 | length 11.7
  Top Layer w0.254: R12.1 31.127,14.224 31.276,14.373 31.276,17.238 29.871,18.643 Q2.1 29.871,22.632 30.226,22.987 D2.1
NetD3_1: D3.1 Q3.1 R9.1 | length 11.4
  Top Layer w0.254: R9.1 25.505,14.224 25.654,14.373 25.654,17.78 24.156,19.278 Q3.1 24.156,22.385 24.336,22.565 24.588,22.565 25.041,23.019 D3.1
NetD4_1: D4.1 Q4.1 R6.1 | length 14.3
  Top Layer w0.254: Q4.1 17.806,19.596 18.156,19.246 v1(18.156,19.177) ; v1@18.151,19.172 v1@18.28,19.042 ; v1@18.288,19.05 19.177,18.161 19.177,15.125 18.316,14.264 R6.1 ; v1(18.415,22.987) D4.1
  Bottom Layer w0.254: v1(18.156,19.177) 18.156,19.182 17.145,20.193 17.145,22.838 17.294,22.987 v1(18.415,22.987)
NetD5_C: D5.C R17.1 | length 7
  Top Layer w0.254: R17.1 32.131,33.506 32.28,33.655 36.803,33.655 36.952,33.804 D5.C
NetD6_A: D6.A R24.2 | length 1.9
  Top Layer w0.254: R24.2 19.522,38.001 D6.A
NetQ1_3: Q1.3 R1.2 R14.1 | length 6.8
  Top Layer w0.254: Q1.3 34.671,17.975 R14.1@35.969,16.677 ; R14.1 R14.1@35.969,16.677 ; v1(36.83,16.764) 36.056,16.764 R14.1@35.969,16.677
  Bottom Layer w0.254: R1.2 36.158,15.009 36.756,15.607 36.756,16.621 36.83,16.695 v1(36.83,16.764)
NetQ2_3: Q2.3 R2.2 R11.1 | length 5.9
  Top Layer w0.254: Q2.3 28.956,17.848 29.873,16.931 R11.1 v1(30.607,16.891)
  Bottom Layer w0.254: R2.2 30.009,15.136 30.607,15.734 v1(30.607,16.891)
NetQ3_3: Q3.3 R3.2 R8.1 | length 6
  Top Layer w0.254: Q3.3 23.241,17.935 23.902,17.274 23.942,17.274 24.285,16.931 R8.1 v1(25.019,16.891)
  Bottom Layer w0.254: R3.2 24.421,15.136 25.019,15.734 v1(25.019,16.891)
NetQ4_3: Q4.3 R4.2 R5.1 | length 6.2
  Top Layer w0.254: Q4.3 16.891,17.721 17.808,16.804 R5.1 v1(18.542,16.764)
  Bottom Layer w0.254: R4.2 18.071,15.009 18.669,15.607 18.542,15.607 v1(18.542,16.764)
NetQ7_1: Q7.1 R28.2 R31.2 | length 30
  Top Layer w0.254: R31.2 32.385,28.807 32.661,29.083 38.227,29.083 ; R28.2 38.227,28.956 ; v1(39.235,25.224) 39.706,24.752 40.085,24.374 40.085,11.985 41.275,10.795 41.275,9.137 Q7.1
  Bottom Layer w0.254: v1(38.227,28.299) 38.296,28.299 38.457,28.46 38.56,28.46 39.011,28.911 39.221,28.911 39.37,28.762 39.37,25.527
NetQ7_9: Q7.9 Q8.9 | length 6.7
  Top Layer w1.27: Q7.9 Q7.9@45.593,18.288
  Top Layer w6.35: Q7.9@45.593,18.288 Q8.9
NetQ8_1: Q8.1 R25.2 R30.1 | length 18.5
  Top Layer w0.254: R25.2 36.322,38.763 37.3,37.785 37.34,37.785 38.456,36.669 49.175,36.669 49.75,36.094 49.75,33.837 Q8.1
NetR21_1: R21.1 U1.25 | length 3.7
  Top Layer w0.254: R21.1 21.11,32.726 21.927,31.909 21.927,30.987 22.415,30.499 23.289,30.499 U1.25
NetR24_1: R24.1 U1.24 | length 13.2
  Top Layer w0.254: v1(17.907,33.274) 17.907,36.294 R24.1 ; U1.24 23.294,30.994 v1(24.633,30.993) v1(24.633,30.993)
  Bottom Layer w0.254: v1(17.907,33.274) 21.695,33.274 21.844,33.125 21.844,31.496 22.347,30.993 v1(24.633,30.993)
NetU1_22: U1.22 U1.23 | length 0.5
  Top Layer w0.254: U1.23 U1.22
PACK-: C11.1 Q7.2 Q7.3 Q7.4 Q7.5 Q7.6 Q7.7 Q7.8 R28.1 U5.1 | length 94.4
  Top Layer w0.254: C11.1 v1(35.013,39.458) ; v1(37.084,26.035) 37.119,26.07 38.192,26.07 R28.1 ; v1(38.531,38.177) 38.567,38.177 39.125,38.735 41.507,38.735 41.656,38.884 41.656,43.46 41.805,43.609 42.085,43.609 43.053,44.577 v1(43.053,44.704) ; Q7.6 Q7.6@47.316,9.571 ; v1(48.514,12.446) v1@48.516,12.444
  Top Layer w0.754: Q7.3@43.688,9.124 v1(43.688,11.811) v1(43.688,12.446) ; v1@44.893,11.811 v1@44.893,12.381 ; Q7.4 44.893,9.119 v1@44.893,12.381 ; v1(44.958,12.446) v1@44.893,12.381 ; v1(46.101,12.446) v1@46.116,12.431 ; Q7.5 v1@46.116,12.431 ; v1@46.116,11.811 v1@46.116,12.431 ; Q7.6@47.293,9.976 47.293,9.548 47.316,9.571 v1(47.316,12.374) ; Q7.6@47.316,9.976 v1(47.316,12.374) ; v1@47.316,11.811 v1(47.316,12.374) ; Q7.7 48.516,12.444 v1@48.516,11.811
  Top Layer w1: Q7.2@42.616,9.096 Q7.3@43.616,9.096
  Bottom Layer w0.254: v1(35.013,39.458) 35.013,38.959 35.679,38.293 37.769,38.293 37.885,38.177 v1(38.531,38.177) ; v1(37.084,26.035) 37.084,28.785 37.233,28.934 38.364,28.934 38.673,29.244 38.673,33.769 38.913,34.008 38.913,35.963 38.531,36.345 38.531,38.158 v1@38.521,38.167
  Bottom Layer w2: v1(43.688,12.446) v1(44.958,12.446) v1(46.101,12.446) 47.371,12.446 47.429,12.388 49.12,12.388 50.319,13.587 50.319,39.71 49.005,41.024 48.6,41.024 45.545,44.079 45.545,44.482 45.323,44.704 v1(45.053,44.704) 44.958,44.704 U5.1@44.958,45.212
  other v1: 44.958,11.811 46.101,11.811 47.244,11.811 48.514,11.811 44.053,44.704 46.053,44.704 47.053,44.704 43.053,45.387 47.053,45.387 43.053,46.387 47.053,46.387 43.053,47.387 47.053,47.387 43.053,48.387 44.053,48.387 45.053,48.387 46.053,48.387 47.053,48.387
RST_MCU: J2.4 U1.5 | length 23.6
  Top Layer w0.254: J2.4 12.534,26.809 13.45,26.809 v1(13.462,26.797) ; v1(27.906,30.028) 27.935,29.999 29.029,29.999 U1.5
  Bottom Layer w0.254: v1(13.462,26.797) 13.555,26.89 29.772,26.89 29.921,27.039 29.921,29.879 29.772,30.028 v1(27.906,30.028)
SRP: C7.2 Q8.2 Q8.3 Q8.4 Q8.5 Q8.6 Q8.7 Q8.8 R25.1 R33.2 U1.7 | length 38.5
  Top Layer w0.254: U1.7 29.035,30.999 29.731,30.999 29.751,31.019 30.603,31.019 31.192,30.429 31.192,30.356 31.782,29.767 39.774,29.767 39.922,29.915 39.922,34.593 ; R25.1 36.346,42.041 37.803,42.041 C7.2 ; C7.2@37.846,41.948 38.219,41.575 38.332,41.575 38.693,41.214 38.693,39.285 v1(38.735,39.243) ; v1(39.616,34.671) 39.665,34.622 39.893,34.622 39.922,34.593 ; Q8.8 41.343,34.593 39.922,34.593
  Top Layer w1.27: 41.851,33.83 Q8.7 Q8.6 Q8.5 Q8.4 Q8.3 47.752,34.239 v1(47.752,34.963) v1(47.752,35.687)
  Bottom Layer w0.254: v1(38.735,39.243) 38.735,39.207 39.166,38.776 39.166,36.967 39.616,36.516 v1(39.616,34.671)
  Bottom Layer w1.27: v1(47.752,35.687) 47.752,38.331 R33.2
TS1: C10.1 J2.3 R21.2 R22.2 R23.2 | length 26.9
  Top Layer w0.254: v1(10.541,25.273) 10.541,25.874 10.69,26.022 11.738,26.022 v1(11.786,26.071) ; v1(11.689,28.326) 11.691,28.323 12.52,28.323 J2.3 ; v1(12.319,32.258) 12.388,32.258 12.607,32.477 19.241,32.477 R21.2 R23.2 R22.2 19.53,36.714 20.913,38.097 20.963,38.097 21.336,38.47 C10.1
  Bottom Layer w0.254: v1(10.541,25.273) 10.541,30.826 11.326,31.611 11.951,32.236 12.297,32.236 v1(12.319,32.258) ; v1(11.689,28.326) 11.689,27.223 11.786,27.125 v1(11.786,26.071)
VREG: R18.2 R19.2 R20.2 U1.3 | length 17.5
  Top Layer w0.254: v1(18.288,31.242) R19.2 R18.2 R20.2 ; v1(27.635,29.316) 27.635,29.262 27.901,28.996 U1.3
  Bottom Layer w0.254: v1(18.288,31.242) 18.288,29.105 18.437,28.956 27.275,28.956 v1(27.635,29.316)
WDI: U1.26 U2.3 | length 21.9
  Top Layer w0.254: U1.26 23.295,29.993 24.49,29.993 v1(24.511,29.972) ; v1(27.94,38.989) 30.849,38.989 31.95,40.09 31.962,40.09 32.171,40.299 32.988,40.299 33.191,40.502 33.191,41.418 34.171,42.398 34.171,42.523 34.419,42.771 U2.3
  Bottom Layer w0.254: v1(24.511,29.972) 25.273,30.734 25.273,38.84 25.422,38.989 v1(27.94,38.989)
XALERT: J2.5 R20.1 U1.30 | length 20.1
  Top Layer w0.254: v1(11.557,25.273) 11.572,25.288 12.489,25.288 J2.5 ; v1(11.786,30.571) 14.133,30.571 17.374,27.33 20.246,27.33 20.727,27.811 20.767,27.811 21.11,28.154 R20.1 21.285,28.019 22.402,28.019 22.573,28.019 22.593,27.999 23.289,27.999 U1.30
  Bottom Layer w0.254: v1(11.557,25.273) 11.054,25.776 11.054,29.838 v1(11.786,30.571)
pads on no net: J3.1 J3.2 U1.15 U1.18 U1.20 U1.21 U1.27 U3.4
copper on no net:
  other v2: 7.747,5.842 49.911,5.842 49.911,50.292
  other v3: 7.493,50.546

## Polygon pours and split planes (outlines as drawn)
no net on Top Layer "NONET_L01_P026" (solid, pour order 26): 5.588,4.699 5.588,51.435 6.604,52.451 51.054,52.451 51.943,51.562 51.943,4.572 50.927,3.556 6.731,3.556
no net on Bottom Layer "NONET_L02_P027" (solid, pour order 27): 5.588,4.699 5.588,51.435 6.604,52.451 51.054,52.451 51.943,51.562 51.943,4.572 50.927,3.556 6.731,3.556

## Keep-outs
Keep-Out Layer:
  the board outline again, w0.3

## Silkscreen, mask and mechanical layers (free items; w line width, h text height)
Top Overlay:
  text "C-01234" at 13.539,18.084 h1.2 r270
  text "BQ29330" at 22.225,7.62 h1.52
  text "4S BMS" at 22.987,5.08 h1.52